# Altium PCB PCB1.PcbDoc
Units mil, origin at the board's own origin, x right, y up, seen from the top; angles counter-clockwise.
Board outline 2500 x 2300 mil, 4 copper layers (Top Layer, GND, VCC, Bottom Layer), stack 35.634 mil thick; 55 components, 72 nets, 269 pads, 87 vias.
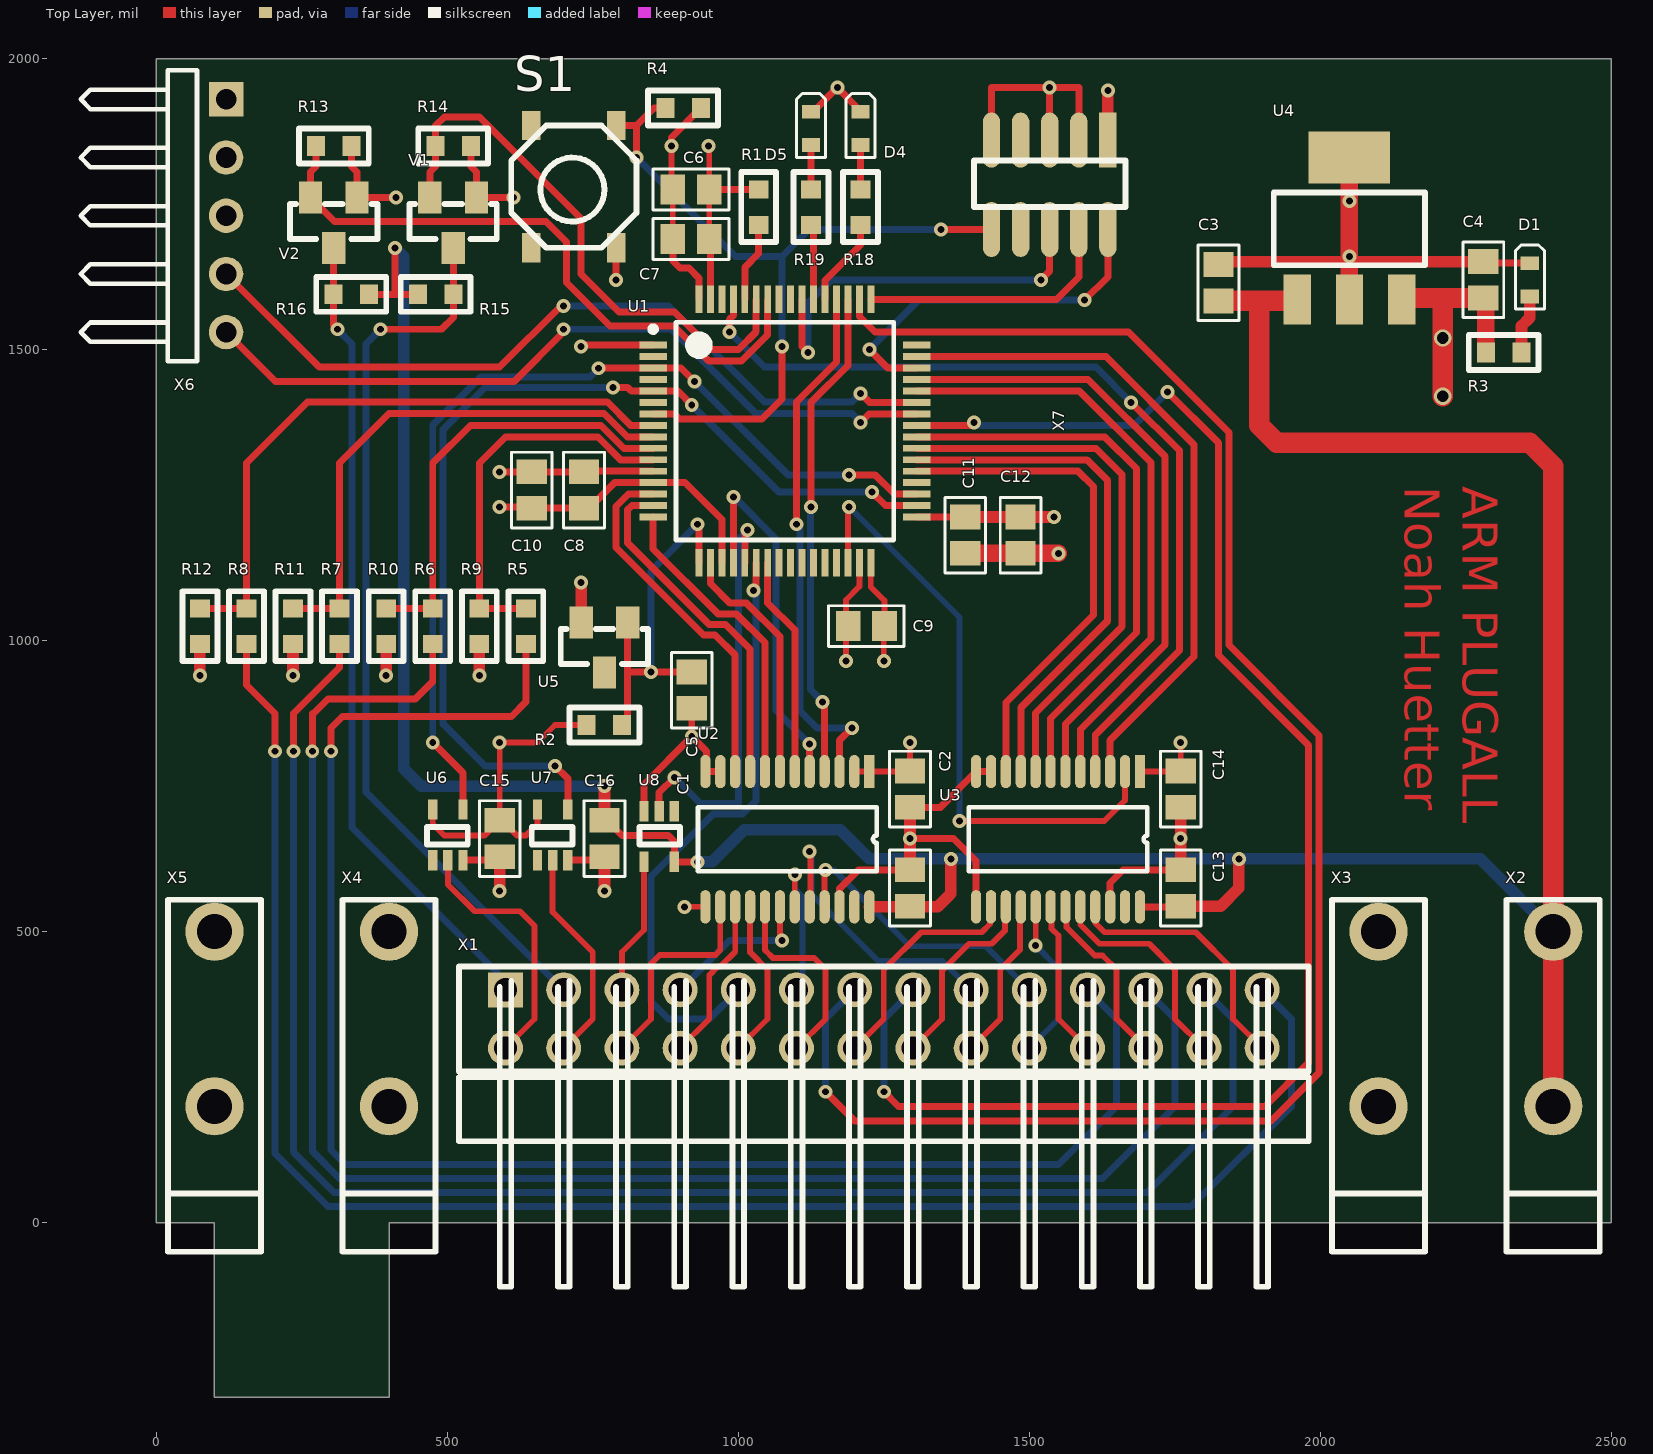
[diagram p0: Top Layer view]
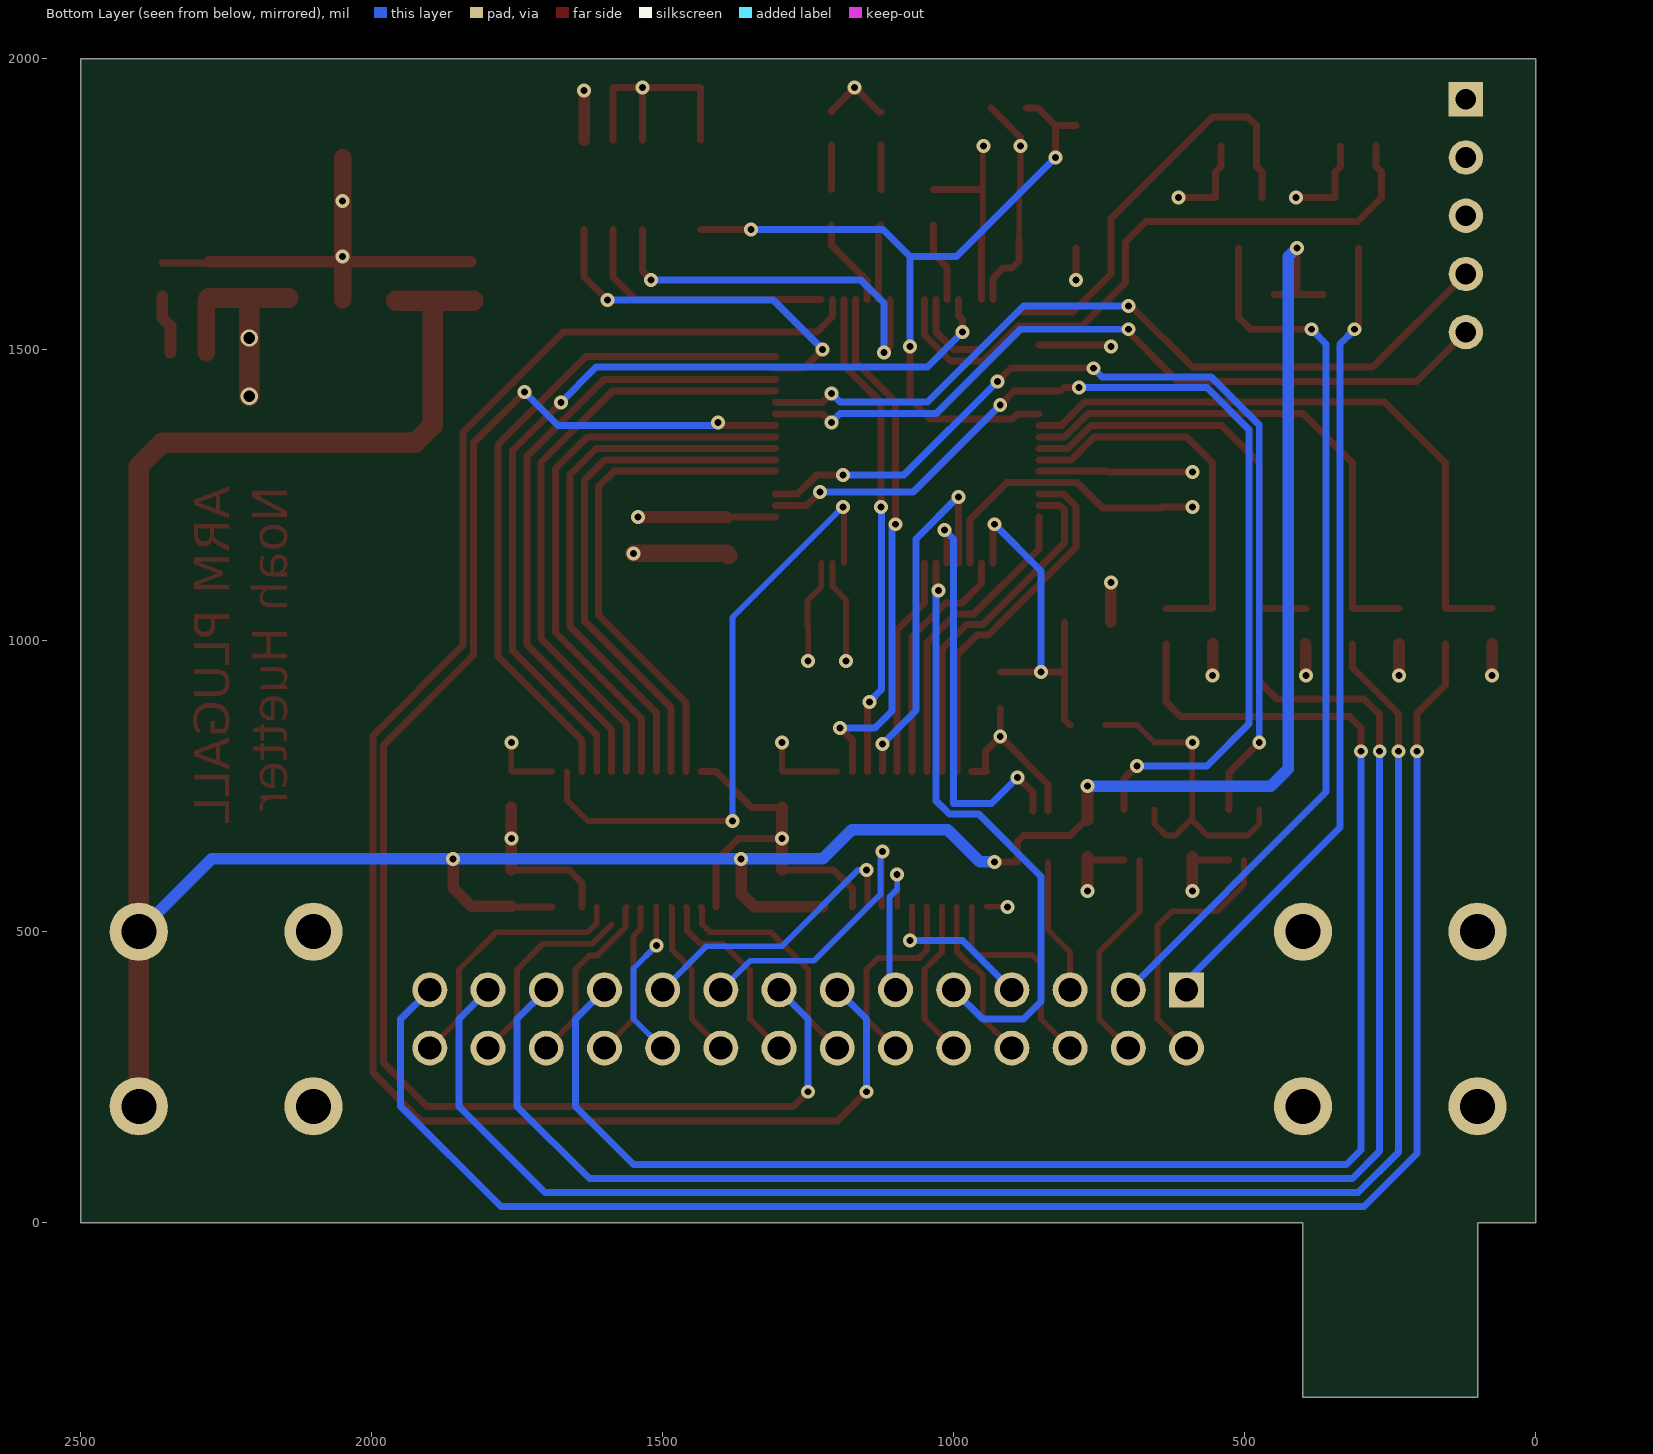
[diagram p1: Bottom Layer view, seen from below]
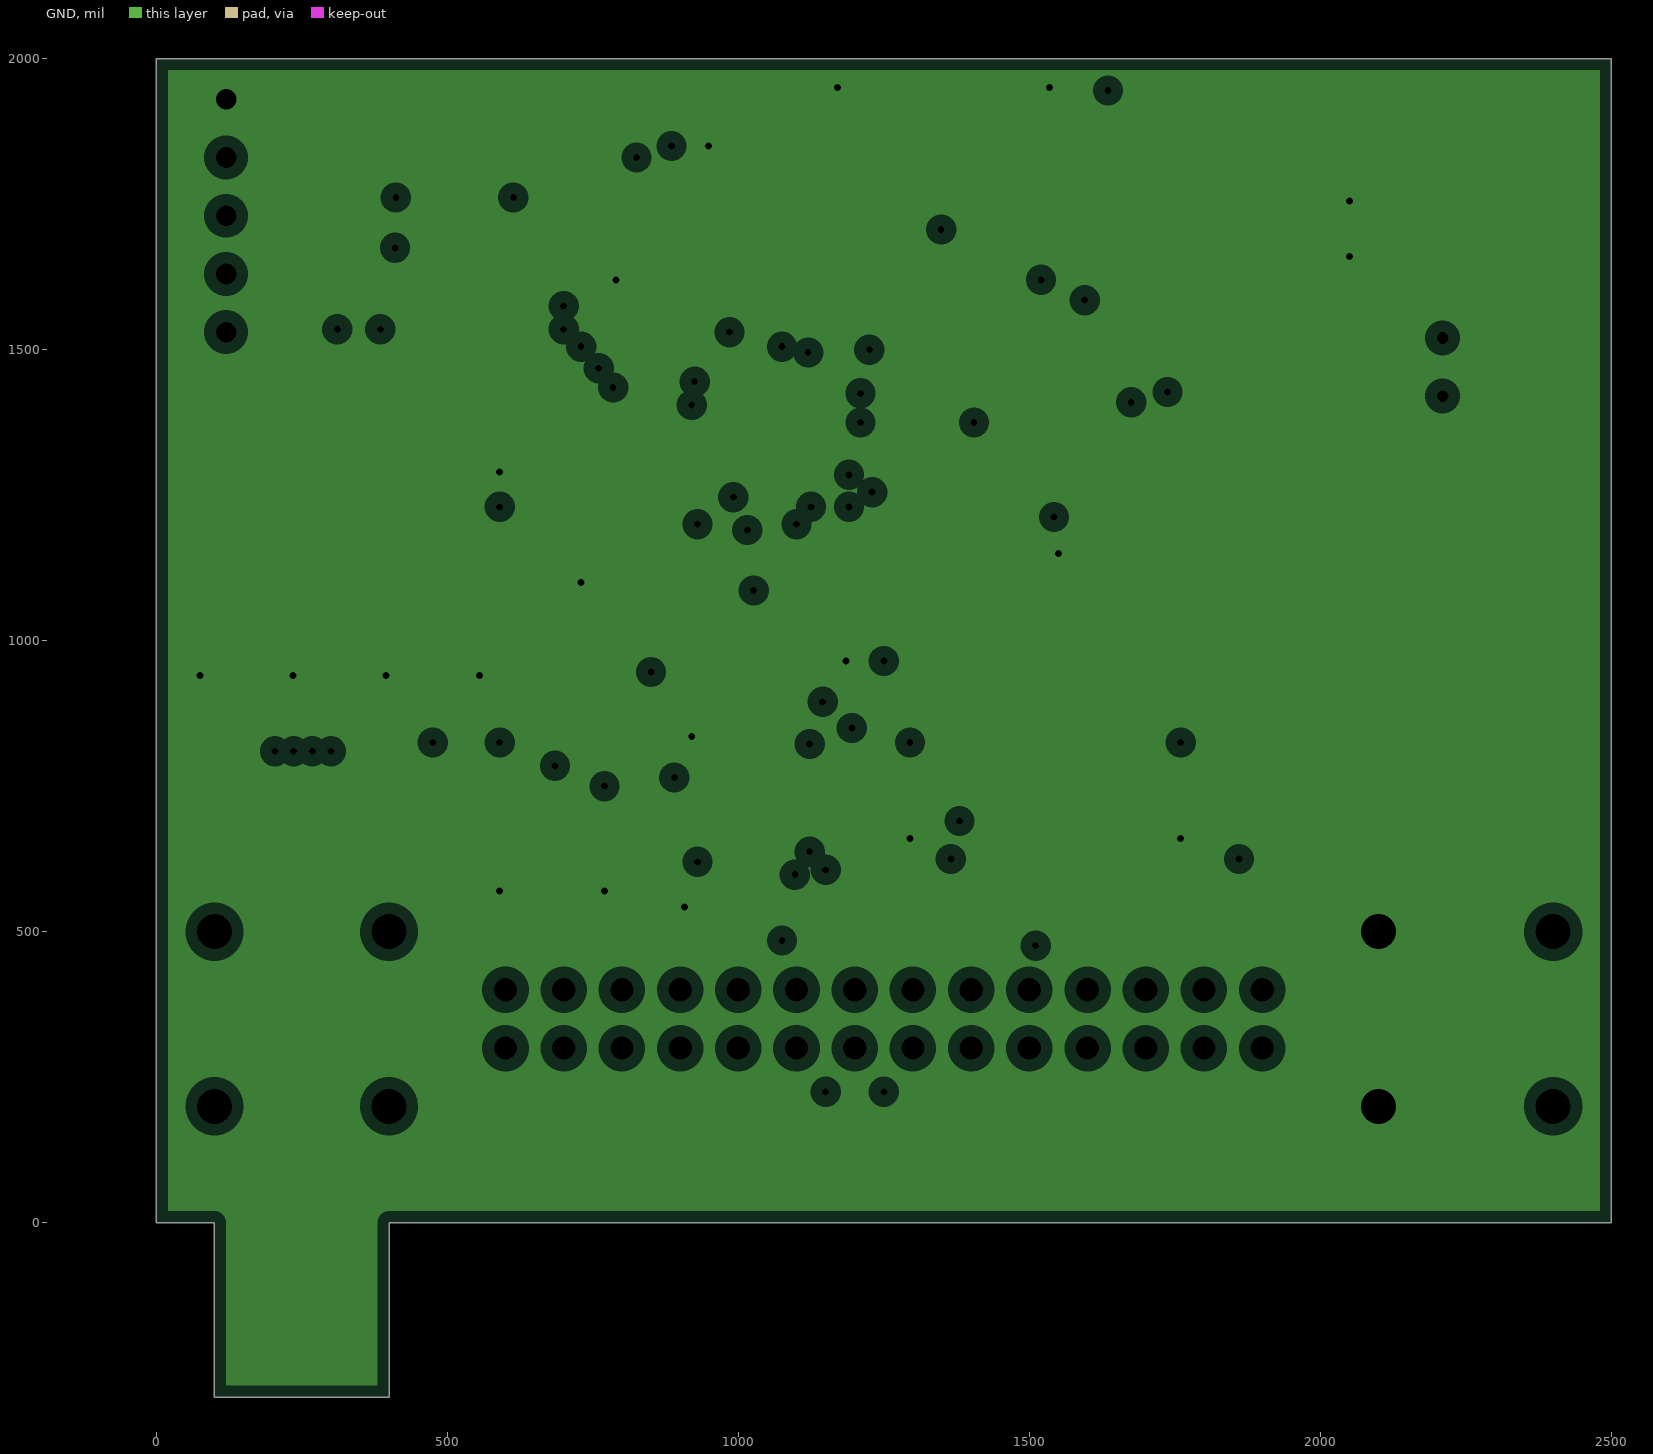
[diagram p2: GND, clearances drawn from the general rule]
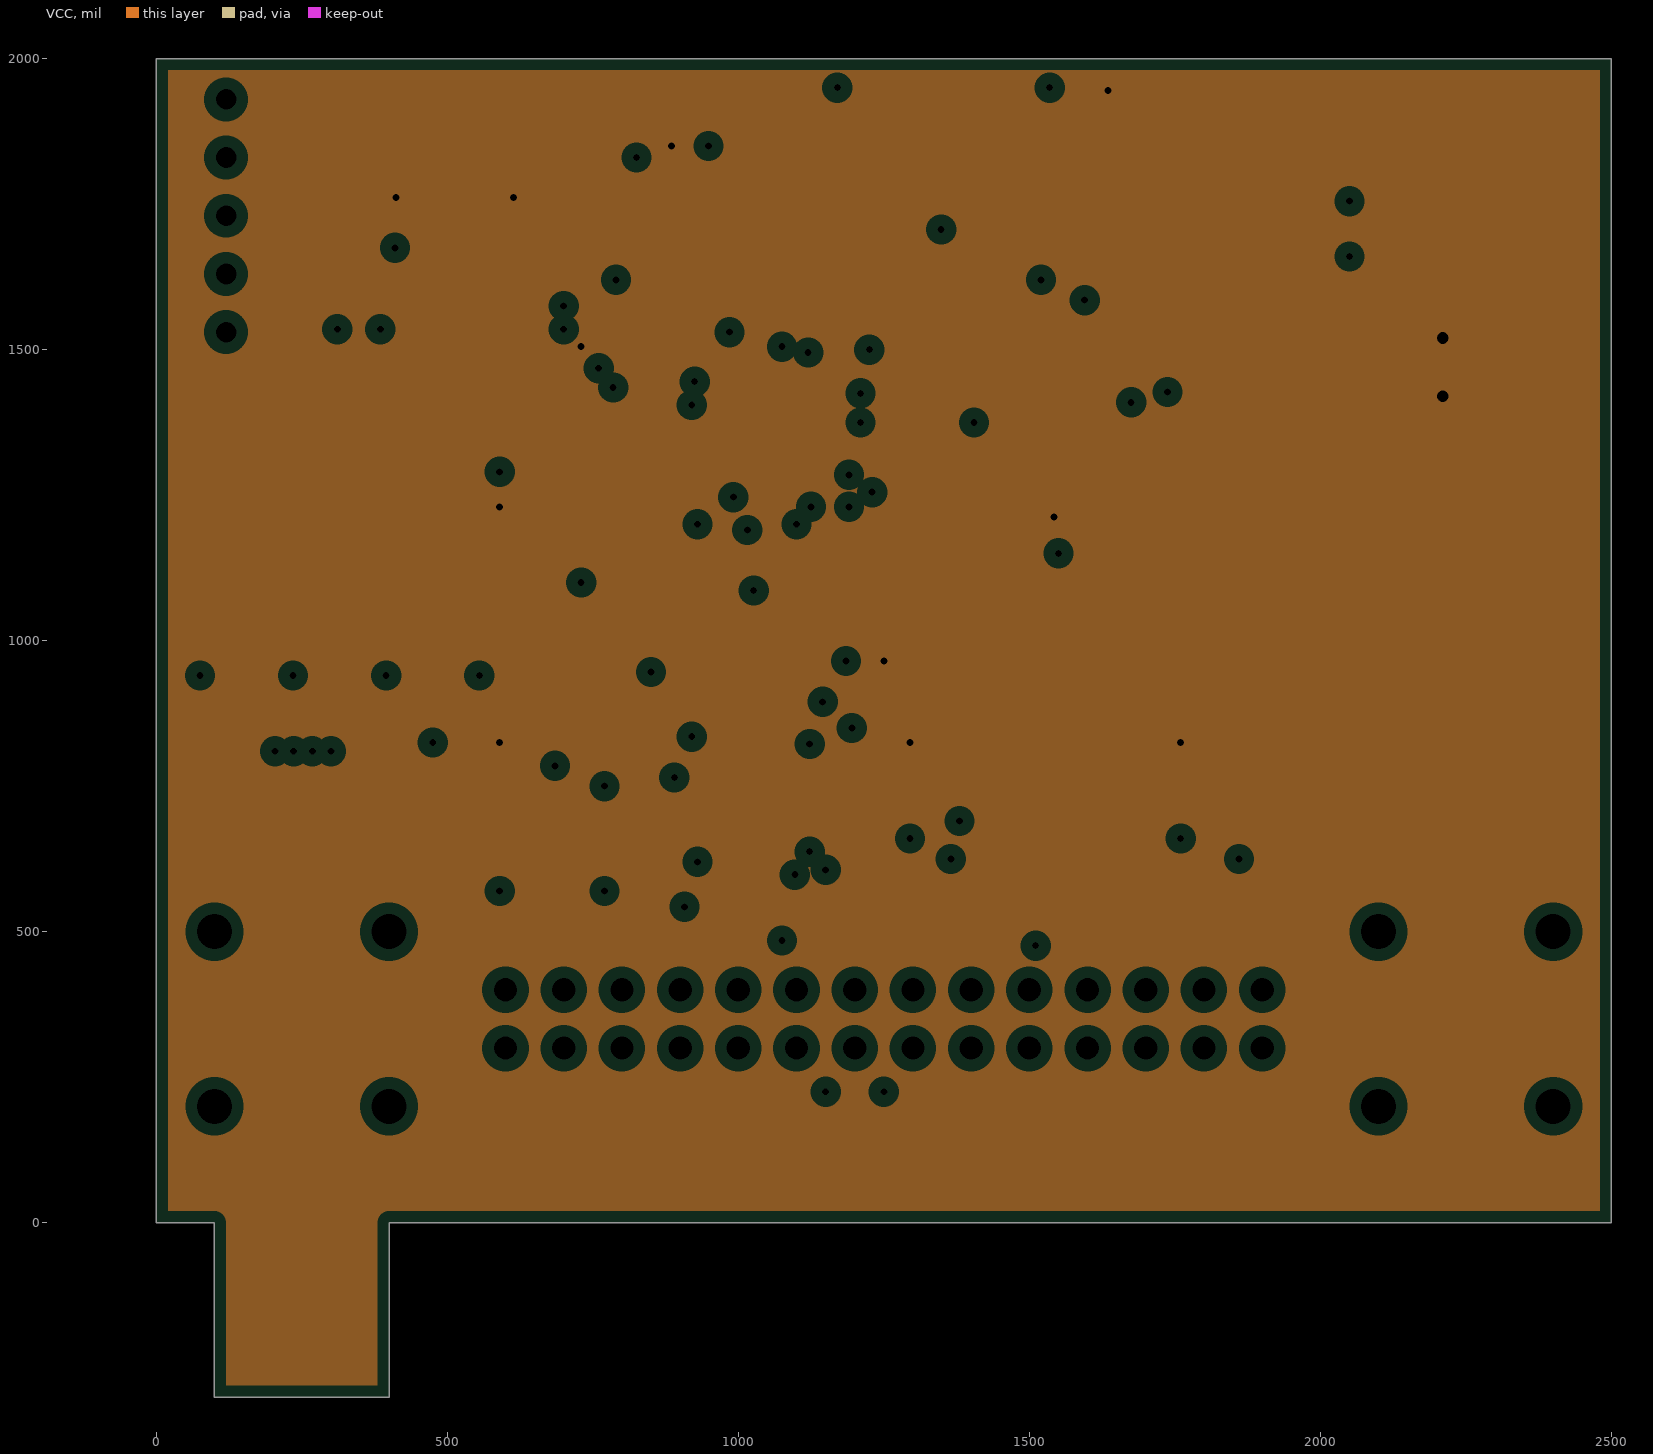
[diagram p3: VCC, clearances drawn from the general rule]

## Layer stack, top to bottom
Top Solder: solder mask 0.4, Solder Resist, Dk 3.5
Top Layer: signal copper 1.4
Dielectric 1: dielectric 10, FR-4, Dk 4.2
GND: plane copper 1.417, net GND
Dielectric 2: dielectric 10, Dk 4.2
VCC: plane copper 1.417, net 3V3
Dielectric 3: dielectric 10, Dk 4.2
Bottom Layer: signal copper 1.4
Bottom Solder: solder mask 0.4, Solder Resist, Dk 3.5

## Board outline
0,0 0,2000 70,2000 2500,2000 2500,1835 2500,0 400,0 400,-300 100,-300 100,0 0,0

## Design rules (kind name [scope] priority, off if disabled: settings)
Clearance [All] p1: gap=6
ComponentClearance [All] p1: gap=6 collisioncheckmode=3 verticalgap=6 showdistances=FALSE
PlaneClearance [All] p1: clearance=20
PlaneConnect [All] p1: planeconnectstyle=Relief reliefexpansion=20 reliefentries=4 reliefconductorwidth=20 reliefairgap=10
PolygonConnect [All] p1: connectstyle=Relief reliefconductorwidth=20 reliefentries=4 polygonreliefangle="90 Angle" airgapwidth=10
RoutingVias [All] p1: holewidth=12 width=24 viastyle="Through Hole" minholewidth=12 minwidth=24 maxholewidth=28 maxwidth=50
SolderMaskExpansion [All] p1: expansion=4
UnpouredPolygon [All] p1: allowunpoured=FALSE
Width Width_GND [InNet('GND')] p1 off: maxlimit=200 minlimit=20 preferedwidth=20
Width Width_VCC [InNet('VCC')] p2 off: maxlimit=200 minlimit=20 preferedwidth=20
Width [All] p3: maxlimit=200 minlimit=6 preferedwidth=12
26 further rules are at their usual default settings.

## Components (designator, comment, footprint, x,y, rotation, side; value= is the part's Value field where it differs from the comment)
C1 "C" 0805 1295,575 r90 top
C2 "C" 0805 1295,745 r270 top
C3 "C" 0805 1825,1615 r270 top
C4 "C" 0805 2280,1620 r270 top
C5 "C" 0805 920,915 r90 top
C6 "C" 0805 918.75,1775 r180 top
C7 "C" 0805 918.75,1690 r180 top
C8 "C" 0805 735,1258.75 r90 top
C9 "C" 0805 1220,1025 r0 top
C10 "C" 0805 645,1258.75 r270 top
C11 "C" 0805 1390,1181.25 r90 top
C12 "C" 0805 1485,1181.25 r90 top
C13 "C" 0805 1760,575 r90 top
C14 "C" 0805 1760,745 r270 top
C15 "C" 0805 590,660 r90 top
C16 "C" 0805 770,660 r90 top
D1 "LED" D_0603 2360,1620 r90 top
D4 "LED" D_0603 1210,1880 r90 top
D5 "LED" D_0603 1125,1880 r90 top
R1 "R" R_0603 1035,1745 r270 top
R2 "R" R_0603 770,855 r180 top
R3 "R" R_0603 2315,1495 r0 top
R4 "R" R_0603 905,1915 r0 top
R5 "R" R_0603 635,1025 r270 top
R6 "R" R_0603 475,1025 r270 top
R7 "R" R_0603 315,1025 r270 top
R8 "R" R_0603 155,1025 r270 top
R9 "R" R_0603 555,1025 r90 top
R10 "R" R_0603 395,1025 r90 top
R11 "R" R_0603 235,1025 r90 top
R12 "R" R_0603 75,1025 r90 top
R13 "R" R_0603 305,1850 r0 top
R14 "R" R_0603 510,1850 r0 top
R15 "R" R_0603 480,1595 r180 top
R16 "R" R_0603 335,1595 r0 top
R18 "R" R_0603 1210,1745 r270 top
R19 "R" R_0603 1125,1745 r270 top
S1 "SW" SW_4x4x1.5 790,1885 r270 top
U1 "STM32F373RBT6" STM-LQFP64_V 1080,1360 r0 top
U2 "74LVX3245" TSSOP24 1225,775 r270 top
U3 "74LVX3245" TSSOP24 1690,775 r270 top
U4 "LM3940IMP-3.3" SOT-223 2050,1830 r0 top
U5 "V_REF" SOT-23 770,945 r180 top
U6 "SN74LV1T34" DCK 475,710 r0 top
U7 "SN74LV1T34" DCK 655,710 r0 top
U8 "SN74LV1T34" DCK 890,620 r180 top
V1 "FDV301N" SOT-23 510,1675 r180 top
V2 "FDV301N" SOT-23 305,1675 r180 top
X1 "PLUGALL_Bus_Con" CON14X2 600,400 r90 top locked
X2 "Socket_2mm" 2MM_BANANA 2400,200 r90 top locked
X3 "Socket_2mm" 2MM_BANANA 2100,200 r90 top locked
X4 "Socket_2mm" 2MM_BANANA 400,200 r90 top locked
X5 "Socket_2mm" 2MM_BANANA 100,200 r90 top locked
X6 "USART1" HDR1X5H 120,1930 r270 top
X7 "SWD" 4448.0054 1635,1860 r270 top

## Footprints (in the part's own frame and the unit in brackets; to place one, negate y for a bottom-side part, rotate by r counter-clockwise, add the part's x,y. Pads: shape width x height; smd on the part's side, far side on the other; paste and mask are expansions set on the pad)
2MM_BANANA [mil]
  round 100 hole 60: 1(0,0) 2(300,0)
  silkscreen extent -250,-80 355,80
0805 [mil]
  rect 42.5x52 smd: 1(-31.25,0) 2(31.25,0)
  silkscreen extent -65,-35 65,35
4448.0054 [mm]
  rect 2.4x0.76 smd: 1(0,0)
  oval 2.4x0.76 smd: 2(3.9,0) 3(0,-1.27) 4(3.9,-1.27) 5(0,-2.54) 6(3.9,-2.54) 7(0,-3.81) 8(3.9,-3.81) 9(0,-5.08) 10(3.9,-5.08)
  silkscreen extent 0.89,-5.84 2.92,0.76
CON14X2 [mil]
  rect 60x60 hole 40: 1(0,0)
  round 60 hole 40: 2(-100,0) 3(0,-100) 4(-100,-100) 5(0,-200) 6(-100,-200) 7(0,-300) 8(-100,-300) 9(0,-400) 10(-100,-400) 11(0,-500) 12(-100,-500) 13(0,-600) 14(-100,-600) 15(0,-700) 16(-100,-700) 17(0,-800) 18(-100,-800) 19(0,-900) 20(-100,-900) 21(0,-1000) 22(-100,-1000) 23(0,-1100) 24(-100,-1100) 25(0,-1200) 26(-100,-1200) 27(0,-1300) 28(-100,-1300)
  silkscreen extent -510,-1380 40,80
D_0603 [mm]
  rect 0.6x0.8 smd: 1(-0.725,0) 2(0.725,0)
  silkscreen extent -1.27,-0.64 1.52,0.64
DCK [mil]
  rect 16x35 smd: 1(0,-87) 2(26,-87) 3(52,-87) 4(52,0) 5(0,0)
  silkscreen extent -10,-60 60,-30
HDR1X5H [mm] "Connector; Header; 5 Position; Right Angle"
  rect 1.5x1.5 hole 0.9: 1(0,0)
  round 1.5 hole 0.9: 2(2.54,0) 3(5.08,0) 4(7.62,0) 5(10.16,0)
  silkscreen extent -1.27,-6.35 11.43,-1.27
R_0603 [mil]
  rect 31x34 smd: 1(-30.5,0) 2(30.5,0)
  silkscreen extent -60,-30 60,30
SOT-23 [mil]
  rect 40x55 smd: 1(-40,-86.5) 2(40,-86.5) 3(0,0)
  silkscreen extent -75,-75 75,-15
SOT-223 [mil]
  rect 47x86 smd: 1(-90,-244) 2(0,-244) 3(90,-244)
  rect 140x89 smd: 4(0,0)
  silkscreen extent -130,-185 130,-60
STM-LQFP64_V [mm] "Thin QFP, 64-Leads, Body 10x10mm, Pitch 0.5mm, ST Recommended"
  rect 1.2x0.3 smd: 1(-5.75,3.75) 2(-5.75,3.25) 3(-5.75,2.75) 4(-5.75,2.25) 5(-5.75,1.75) 6(-5.75,1.25) 7(-5.75,0.75) 8(-5.75,0.25) 9(-5.75,-0.25) 10(-5.75,-0.75) 11(-5.75,-1.25) 12(-5.75,-1.75) 13(-5.75,-2.25) 14(-5.75,-2.75) 15(-5.75,-3.25) 16(-5.75,-3.75) 33(5.75,-3.75) 34(5.75,-3.25) 35(5.75,-2.75) 36(5.75,-2.25) 37(5.75,-1.75) 38(5.75,-1.25) 39(5.75,-0.75) 40(5.75,-0.25) 41(5.75,0.25) 42(5.75,0.75) 43(5.75,1.25) 44(5.75,1.75) 45(5.75,2.25) 46(5.75,2.75) 47(5.75,3.25) 48(5.75,3.75)
  rect 0.3x1.2 smd: 17(-3.75,-5.75) 18(-3.25,-5.75) 19(-2.75,-5.75) 20(-2.25,-5.75) 21(-1.75,-5.75) 22(-1.25,-5.75) 23(-0.75,-5.75) 24(-0.25,-5.75) 25(0.25,-5.75) 26(0.75,-5.75) 27(1.25,-5.75) 28(1.75,-5.75) 29(2.25,-5.75) 30(2.75,-5.75) 31(3.25,-5.75) 32(3.75,-5.75) 49(3.75,5.75) 50(3.25,5.75) 51(2.75,5.75) 52(2.25,5.75) 53(1.75,5.75) 54(1.25,5.75) 55(0.75,5.75) 56(0.25,5.75) 57(-0.25,5.75) 58(-0.75,5.75) 59(-1.25,5.75) 60(-1.75,5.75) 61(-2.25,5.75) 62(-2.75,5.75) 63(-3.25,5.75) 64(-3.75,5.75)
  silkscreen extent -5.87,-4.75 4.75,4.75, body extent -5,-5 5,5, height 1.6
SW_4x4x1.5 [mil]
  rect 50x32 smd: 1(0,0) 2(210,0) 3(0,-146) 4(210,-146)
  silkscreen extent 0,-180 210,35
TSSOP24 [mm]
  rect 1.45x0.45 smd: 1(0,0)
  oval 1.45x0.45 smd: 2(0,-0.65) 3(0,-1.3) 4(0,-1.95) 5(0,-2.6) 6(0,-3.25) 7(0,-3.9) 8(0,-4.55) 9(0,-5.2) 10(0,-5.85) 11(0,-6.5) 12(0,-7.15) 13(5.9,-7.15) 14(5.9,-6.5) 15(5.9,-5.85) 16(5.9,-5.2) 17(5.9,-4.55) 18(5.9,-3.9) 19(5.9,-3.25) 20(5.9,-2.6) 21(5.9,-1.95) 22(5.9,-1.3) 23(5.9,-0.65) 24(5.9,0)
  silkscreen extent 1.56,-7.48 4.34,0.33

## Part data
R1 R2 R3 R4 R5 R6 R7 R8 R9 R10 R11 R12 R13 R14 R15 R16 R18 R19: library part RES_EU
U1: library part CMP-0572-00032-2, "ARM Cortex-M4 32-bit MCU, 128 KB Flash, 24 KB Internal RAM, 52 I/Os, 64-pin LQFP, -40 to 85 degC, Tray"
V1 V2: library part MOSFET-N
X1: "PLUGALL Card Connector"
X6: library part "Header 5H", "Header, 5-Pin, Right Angle"

## Via types
v1: diameter 24, hole 12, Top Layer to Bottom Layer, 85 vias
v2: diameter 30, hole 20, Top Layer to Bottom Layer, 2 vias

## Nets (pads, with @x,y where several pads share a name; then routed paths per layer and width w, separated by ;. In a path a pad name is that pad's centre, name@x,y a point inside that pad or via, vN(x,y) a via of type N, cw(c..) or ccw(c..) an arc to the next point about the centre after c; other vN are vias at no path point)
3V3: C2.1 C4.2 C6.2 C7.2 C8.1 C9.2 C10.2 C11.2 C12.2 C14.1 C15.2 R2.2 R3.1 R4.2 R13.2 R14.2 U1.1 U1.13 U1.19 U1.32 U1.33 U1.64 U2.1 U2.2 U3.1 U4.3 U6.5 U7.5 V1.1 V2.1 X7.1 | length 3044.9
  Top Layer w10: U6.5 475,685 495,665 563.75,665 C15.2 ; U7.5 655,685 635,665 620,665 593.75,691.25 C15.2 ; R2.2 685,855 655,825 v1(590,825) C15.2 ; v1(885,1850) 885,1777.5 C6.2 C7.2 ; U2.2 U2.1 C2.1@1293.75,775 ; U1.32 1227.64,1092.36 1251.25,1068.75 C9.2 1250,1023.75 v1(1250,965) ; C2.1 v1(1295,825) ; U3.1 C14.1@1758.75,775 ; C14.1 v1(1760,825)
  Top Layer w12: R13.2 335.5,1814.5 345,1805 V2.1 v1(411.5,1761.5) ; R14.2 540.5,1814.5 550,1805 V1.1 v1(613.5,1761.5) ; v1(590,1230) 642.5,1230 C10.2 743.75,1227.5 787.67,1271.42 908.58,1271.42 971.73,1208.27 U1.19 ; v1(730,1505) 732.64,1507.64 U1.1 ; v1(885,1850) 885,1864.5 R4.2 ; C7.2 887.5,1652.5 900,1640 915,1640 932.36,1622.64 U1.64 ; U1.33 C11.2@1387.64,1212.36
  Top Layer w20: C11.2@1388.75,1211.25 C11.2 C12.2 v1(1542.5,1212.5) ; X7.1 v1(1635,1945)
  Top Layer w30: C4.2 2284.5,1584.25 R3.1
  Top Layer w35: U4.3@2142.75,1588.75 2210,1588.75 ; v2(2210,1420) 2210,1588.75 ; C4.2 2210,1588.75
  other v2: 2210,1520
+12V: X4.2
-5V: X5.2
/RESET: R4.1 S1.1 U1.7 X7.10 | length 1335.6
  Top Layer w12: S1.1 825,1885 ; v1(825,1830) 825,1885 ; U1.7 890.47,1389.53 899,1381 1041,1381 1075,1415 v1(1075,1505) ; R4.1 855,1915 825,1885 ; v1(1348.54,1706.46) X7.10
  Bottom Layer w12: v1(825,1830) 995,1660 1075,1660 ; v1(1075,1505) 1075,1660 ; v1(1348.54,1706.46) 1121.46,1706.46 1075,1660
AIN0: R5.1 R9.2 U1.11 | length 663
  Top Layer w12: R5.1 R9.2 555,1305 600,1350 758.63,1350 797.85,1310.79 U1.11
AIN1: R6.1 R10.2 U1.10 | length 751.4
  Top Layer w12: R10.2 R6.1 475,1305 540,1370 764.09,1370 803.62,1330.47 U1.10
AIN2: R7.1 R11.2 U1.9 | length 919.8
  Top Layer w12: R11.2 R7.1 315,1305 400,1390 769.54,1390 809.39,1350.16 U1.9
AIN3: R8.1 R12.2 U1.8 | length 1088.2
  Top Layer w12: R12.2 R8.1 155,1305 260,1410 775,1410 815.16,1369.84 U1.8
CP0: U6.2 X1.2 | length 451.1
  Top Layer w10: U6.2 501,581 547,535 625,535 650,510 650,350 X1.2
CP0_3V3: U1.3 U1.35 U6.4 | length 1643.6
  Top Layer w12: v1(475,825) 527,773 U6.4 ; v1(760,1468) 760.27,1468.27 U1.3 901.73,1468.27 v1(925,1445) ; v1(1190,1285) 1235,1285 1268.27,1251.73 U1.35
  Bottom Layer w12: v1(475,825) 475,1370.46 557.54,1453 745,1453 v1(760,1468) ; v1(925,1445) 1085,1285 v1(1190,1285)
CP1: U7.2 X1.4 | length 372.3
  Top Layer w10: U7.2 681,534 750,465 750,350 X1.4
CP1_3V3: U1.5 U1.34 U7.4 | length 1739.2
  Top Layer w12: v1(685,785) 707,763 U7.4 ; v1(785,1435) 810,1435 816.1,1428.9 U1.5 896.1,1428.9 v1(920,1405) ; v1(1230,1255) 1252.95,1232.05 U1.34
  Bottom Layer w12: v1(685,785) 565,785 493,857 493,1363 565,1435 v1(785,1435) ; v1(920,1405) 1070,1255 v1(1230,1255)
CS0: U2.14 X1.6 | length 366.3
  Top Layer w10: X1.6 850,350 850,445 865,460 960.66,460 967.36,466.7 ; 969.09,468.43 U2.14
CS0_3V3: U1.14 U2.10 | length 624.4
  Top Layer w12: U1.14 811.28,1251.73 790,1230.46 790,1160 940,1010 960,1010 994.68,975.32 U2.10
CS1: U2.15 X1.8 | length 284.2
  Top Layer w10: X1.8 950,350 950,425 965,440 968.94,440 994.68,465.74 U2.15
CS1_3V3: U1.15 U2.9 | length 600.1
  Top Layer w12: U1.15 817.05,1232.05 810,1225 810,1168.1 950,1028.09 978.1,1028.09 1020.27,985.92 U2.9
CS2: U2.16 X1.10 | length 275.7
  Top Layer w10: X1.10 1050,350 1050,435 1020.27,464.72 U2.16
CS2_3V3: U1.16 U2.8 | length 535.3
  Top Layer w12: U1.16 853.62,1157.57 965,1046.19 996.19,1046.19 1045.87,996.52 U2.8
CS3: U2.17 X1.12 | length 345.5
  Top Layer w10: 1045.87,468.43 U2.17 ; 1047.6,466.7 1059.3,455 1130,455 1150,435 1150,350 X1.12
CS3_3V3: U1.18 U2.7 | length 424.8
  Top Layer w12: U1.18 952.05,1097.95 985.71,1064.29 1014.29,1064.29 1071.46,1007.12 U2.7
D0: U3.14 X1.14 | length 400.7
  Top Layer w10: X1.14 1250,350 1250,435 1314.17,499.17 1418.39,499.17 1432.36,513.15 1432.36,540.98 U3.14
D0_3V3: U1.37 U3.10 | length 866.7
  Top Layer w12: U1.37 1583.9,1291.1 1610,1265 1610,1044.36 1459.68,894.04 U3.10
D1: U3.15 X1.16 | length 331.9
  Top Layer w10: X1.16 1350,350 1350,433.03 1396.14,479.17 1435.42,479.17 1457.95,501.7 1457.95,540.98 U3.15
D1_3V3: U1.38 U3.9 | length 905.1
  Top Layer w12: U1.38 1599.12,1310.79 1634.68,1275.22 1634.68,1034.13 1485.27,884.72 U3.9
D2: U3.16 X1.18 | length 278
  Top Layer w10: X1.18 1450,350 1450,435 1483.87,468.87 1483.87,541.31 U3.16
D2_3V3: U1.39 U3.8 | length 943.6
  Top Layer w12: U1.39 1614.34,1330.47 1659.37,1285.45 1659.37,1023.91 1510.87,875.41 U3.8
D3: U3.17 X1.20 | length 279.6
  Top Layer w10: v1(1510.87,475.87) U3.17
  Bottom Layer w10: X1.20 1550,350 1550,436.73 v1(1510.87,475.87)
D3_3V3: U1.40 U3.7 | length 982.1
  Top Layer w12: U1.40 1629.57,1350.16 1684.05,1295.67 1684.05,1013.69 1536.46,866.09 U3.7
D4: U3.18 X1.22 | length 266.6
  Top Layer w10: U3.18@1538.19,540.98 1538.19,505.07 1550,493.26 1550,350 X1.22
D4_3V3: U1.44 U3.6 | length 1045
  Top Layer w12: U1.44 1585.74,1428.9 1708.74,1305.9 1708.74,1003.46 1562.05,856.77 U3.6
D5: U3.19 X1.24 | length 307.7
  Top Layer w10: U3.19 1563.78,540.98 1563.78,507.76 1612.37,459.17 1625.83,459.17 1650,435 1650,350 X1.24
D5_3V3: U1.45 U3.5 | length 1083.4
  Top Layer w12: U1.45 1600.96,1448.58 1733.42,1316.12 1733.42,993.24 1587.64,847.46 U3.5
D6: U3.20 X1.26 | length 350
  Top Layer w10: 1587.64,512.19 1620.65,479.17 1705.83,479.17 1750,435 1750,350 X1.26
D6_3V3: U1.61 U3.4 | length 1527.9
  Top Layer w12: v1(985,1530) 985,1552.17 991.42,1558.58 U1.61 ; U3.4 1613.23,838.14 1758.1,983.01 1758.1,1326.35 v1(1675,1409.45)
  Bottom Layer w12: v1(985,1530) 1045,1470 1614.45,1470 v1(1675,1409.45)
D7: U3.21 X1.28 | length 453.4
  Top Layer w10: U3.21 1613.23,514.88 1628.94,499.17 1785.83,499.17 1850,435 1850,350 X1.28
D7_3V3: U1.47 U3.3 | length 1160.3
  Top Layer w12: U1.47 1631.41,1487.95 1782.79,1336.57 1782.79,972.79 1638.82,828.82 U3.3
DAC0: U2.20 X1.17 | length 512.5
  Top Layer w10: U2.20 1124.05,544.13 1124.05,635.95 v1(1122.64,637.36)
  Bottom Layer w10: v1(1122.64,637.36) 1126,634 1126,564 1240,450 1350,450 X1.17
DAC0_3V3: U1.51 U2.4 | length 843.5
  Top Layer w12: v1(1125,1230) 1125,1409.54 1188.27,1472.81 U1.51 ; U2.4 v1@1148.23,891.77
  Bottom Layer w12: v1(1125,1230) 1124,1229 1124,916 v1(1145,895)
DAC1: U2.21 X1.19 | length 499.7
  Top Layer w10: U2.21 1148.23,604.46 v1(1150,606.23)
  Bottom Layer w10: v1(1150,606.23) 1163.77,606.23 1295,475 1425,475 X1.19
DAC1_3V3: U1.52 U2.3 | length 923.1
  Top Layer w12: v1(1100,1200) 1100,1410 1168.58,1478.58 U1.52 ; U2.3 1173.82,828.82 v1(1195,850)
  Bottom Layer w12: v1(1100,1200) 1106,1194 1106,879 1135,850 v1(1195,850)
DATA_TR: U1.30 U3.2 | length 1064.4
  Top Layer w10: U1.30 1188.27,1228.27 v1(1190,1230) ; v1(1380,690) 1628.82,690 1664.41,725.59 U3.2
  Bottom Layer w10: v1(1190,1230) 1380,1040 v1(1380,690)
GND: C1.2 C2.2 C3.1 C4.1 C5.1 C6.1 C7.1 C8.2 C9.1 C10.1 C11.1 C12.1 C13.2 C14.2 C15.1 C16.1 D1.2 D4.2 D5.2 R1.1 R9.1 R10.1 R11.1 R12.1 S1.2 U1.12 U1.31 U1.63 U2.11 U2.12 U2.13 U2.22 U3.11 U3.12 U3.13 U3.22 U4.2 U4.4 U5.2 U6.3 U7.3 U8.3 X3.1 X3.2 X6.1 X7.3 X7.5 X7.9 | length 4121.9
  Top Layer w10: C15.1@584.25,623 C15.1@590,628.75 ; C16.1@764.25,623 C16.1@770,628.75 ; v1(907.72,542.72) U2.13 ; v1(948.75,1850) 950,1848.75 C7.1 ; v1(1185,965) 1185,1070 1207.95,1092.95 U1.31
  Top Layer w12: U6.3 C15.1@584.25,623 ; v1(590,1290) C10.1 C8.2 ; U7.3 C16.1@764.25,623 ; C8.2@736.1,1291.1 U1.12 ; v1(790,1620) S1.2 ; U8.3 838,753 v1(920,835) ; C5.1 v1(920,835) ; C6.1@950.5,1775.5 R1.1 ; U1.63 C7.1@952.05,1687.95 ; U2.11 U2.12 945,776.5 945,810 v1(920,835) ; D5.2 1128.54,1908.54 v1(1170,1950) 1210,1910 D4.2 ; U2.22 1173.82,573.82 1206.25,606.25 C1.2 ; v1(1295,660) 1370,660 1408.5,621.5 U3.13 ; C2.2 1347.25,713.75 U3.12 U3.11 ; X7.9 1435,1950 v1(1535,1950) ; X7.5 v1(1535,1950) ; X7.3 1585,1950 v1(1535,1950) ; U3.22 1638.82,583.82 1661.25,606.25 C13.2 ; C4.1@2282.71,1648.54 D1.2
  Top Layer w20: v1(75,940) R12.1 ; v1(235,940) R11.1 ; v1(395,940) R10.1 ; v1(555,940) R9.1 ; v1(590,570) C15.1@590,628.75 ; U5.2 v1(730,1100) ; v1(770,570) C16.1@770,628.75 ; C1.2 v1(1295,660) C2.2 ; C13.2 v1(1760,660) C14.2 ; C3.1@1830,1651.25 2050,1651.25 C4.1
  Top Layer w30: C11.1@1386.25,1146.25 C11.1 C12.1 v1(1550,1150) ; U4.2 2050,1651.25 v1(2050,1660) v1(2050,1755) U4.4
INT0: U1.50 X1.13 | length 3009.5
  Top Layer w12: v1(1150,225) 1200,175 1915.36,175 1998,257.64 1998,837.36 1842.68,992.68 1842.68,1357.32 1670,1530 1235,1530 1207.95,1557.05 U1.50
  Bottom Layer w12: v1(1150,225) 1150,350 X1.13
INT1: U1.41 X1.15 | length 2678.9
  Top Layer w12: v1(1250,225) 1275,200 1905,200 1980,275 1980,820 1824.68,975.32 1824.68,1339.97 v1(1737.32,1427.32) ; U1.41 1399.84,1369.84 v1(1405,1375)
  Bottom Layer w12: v1(1250,225) 1250,350 X1.15 ; v1(1405,1375) 1410,1370 1680,1370 v1(1737.32,1427.32)
MISO_3V3: U1.22 X1.9 | length 1044.1
  Top Layer w12: v1(1026.47,1086.04) 1030.79,1090.36 U1.22
  Bottom Layer w12: X1.9 950,350 880,350 850,380 850,595 957,702 1007.46,702 1030,724.54 1030,1082.51 v1(1026.47,1086.04)
MOSI: U2.18 X1.7 | length 269.4
  Top Layer w10: U2.18 1071.46,488.54 v1(1075,485)
  Bottom Layer w12: X1.7 985,485 v1(1075,485)
MOSI_3V3: U1.23 U2.6 | length 377.9
  Top Layer w12: U1.23 1050.47,1064.53 1097.05,1017.95 U2.6
NetC5_2: C5.2 R2.1 U1.17 U5.1 | length 640.1
  Top Layer w12: R2.1 810,864.5 U5.1 ; 811.25,946.25 v1(850,946.25) C5.2 ; U1.17 v1@932.36,1197.64
  Bottom Layer w12: v1(850,946.25) 850,1120 v1(930,1200)
NetD1_1: D1.1 R3.2 | length 102.5
  Top Layer w20: R3.2 2345.5,1540.5 2360,1555 D1.1
NetD4_1: D4.1 R18.1 | length 76
  Top Layer w12: R18.1 D4.1
NetD5_1: D5.1 R19.1 | length 76
  Top Layer w12: R19.1 D5.1
NetR1_2: R1.2 U1.60 | length 138
  Top Layer w12: U1.60 1011.1,1641.1 1035,1665 R1.2
NetR5_2: R5.2 X1.21 | length 2800.6
  Top Layer w12: v1(300,810) 300,850 320,870 610,870 635,895 R5.2
  Bottom Layer w12: v1(300,810) 300,125 325,100 1550,100 1650,200 1650,350 X1.21
NetR6_2: R6.2 X1.23 | length 2819.8
  Top Layer w12: v1(268,810) 268,875 270,875 295,900 445,900 475,930 R6.2
  Bottom Layer w12: v1(268,810) 268,123.06 315.06,76 1626,76 1750,200 1750,350 X1.23
NetR7_2: R7.2 X1.25 | length 2830.7
  Top Layer w12: v1(236,810) 236,875 315,954 R7.2
  Bottom Layer w12: v1(236,810) 236,121.12 305.12,52 1702,52 1850,200 1850,350 X1.25
NetR8_2: R8.2 X1.27 | length 2971.3
  Top Layer w12: R8.2 155,924 204,875 v1(204,810)
  Bottom Layer w12: v1(204,810) 204,119.18 295.18,28 1778,28 1950,200 1950,350 X1.27
NetR18_2: R18.2 U1.53 | length 153.4
  Top Layer w12: U1.53 1148.9,1618.9 1210,1680 R18.2
NetR19_2: R19.2 U1.54 | length 129.9
  Top Layer w12: R19.2 1129.21,1710.29 U1.54
NetU8_4: U8.4 X1.5 | length 235.7
  Top Layer w10: X1.5 800,465 838,503 U8.4
NSS: U2.19 X1.11 | length 248.6
  Top Layer w10: U2.19 v1(1097.05,597.95)
  Bottom Layer w10: v1(1097.05,597.95) 1097.05,572.95 1110,560 X1.11@1110,410
NSS_3V3: U1.20 U2.5 | length 639.8
  Top Layer w12: U1.20 v1(991.42,1246.42) ; U2.5 v1(1122.64,822.64)
  Bottom Layer w12: v1(991.42,1246.42) 993.58,1246.42 1065,1175 1065,880.28 v1(1122.64,822.64)
SCK_3V3: U1.21 U8.2 | length 736
  Top Layer w12: U8.2 864,739 v1(890,765) ; U1.21 1011.1,1188.9 1010,1190 v1(1015.42,1190)
  Bottom Layer w12: v1(890,765) 935,720 1000,720 1000,1174.58 v1(1015.42,1190)
SCL: R16.1 V2.3 X1.1 | length 1396.9
  Top Layer w12: V2.3@304.5,1674.5 R16.1 304.5,1541.5 v1(311,1535)
  Bottom Layer w12: v1(311,1535) 336,1510 336,679 600,415 X1.1
SCL_3V3: R13.1 U1.58 V2.2 | length 1115.3
  Top Layer w12: R13.1 274.5,1814.5 265,1805 V2.2 306.18,1720.32 669.68,1720.32 705,1685 705,1615 779.68,1540.32 889.23,1540.32 949.23,1480.32 1005.77,1480.32 1050.47,1525.02 U1.58
SDA: R15.1 V1.3 X1.3 | length 1539.2
  Top Layer w12: v1(385,1535) 490,1535 510.5,1555.5 R15.1 V1.3@510.5,1674.5
  Bottom Layer w12: v1(385,1535) 360,1510 360,740 X1.3
SDA_3V3: R14.1 U1.59 V1.2 | length 974.3
  Top Layer w12: V1.2 470,1805 480,1815 480,1885 495,1900 555,1900 730,1725 730,1630 795,1565 890,1565 955,1500 1000,1500 1030.79,1530.79 U1.59
SWCLK: U1.49 X7.4 | length 454.8
  Top Layer w12: U1.49 1546.38,1586.38 1585,1625 X7.4
SWDAT: U1.46 X7.2 | length 637.8
  Top Layer w12: v1(1225,1500) 1256.73,1468.27 U1.46 ; v1(1595,1585) 1635,1625 X7.2
  Bottom Layer w12: v1(1225,1500) 1310,1585 v1(1595,1585)
SWO: U1.55 X7.6 | length 690
  Top Layer w12: U1.55 1109.53,1505.47 v1(1120,1495) ; v1(1520,1620) 1535,1635 X7.6
  Bottom Layer w12: v1(1120,1495) 1120,1580 1160,1620 v1(1520,1620)
USART1_RX: U1.43 X6.4 | length 1377.2
  Top Layer w12: X6.4 280,1470 590,1470 695,1575 v1(700,1575) ; v1(1210,1425) 1225.79,1409.21 U1.43
  Bottom Layer w12: v1(700,1575) 880,1575 1045,1410 1195,1410 v1(1210,1425)
USART1_TX: U1.42 X6.5 | length 1334.1
  Top Layer w12: X6.5 205,1445 615,1445 700,1530 v1(700,1535) ; v1(1210,1375) 1224.53,1389.53 U1.42
  Bottom Layer w12: v1(700,1535) 885,1535 1030,1390 1195,1390 v1(1210,1375)
VCC: C1.1 C3.2 C13.1 C16.2 R15.2 R16.2 U2.24 U3.24 U4.1 U8.5 X2.1 X2.2 | length 5664.7
  Top Layer w12: R16.2 410,1595 ; v1(410,1675) 410,1595 ; R15.2 410,1595 ; C16.2 773.75,691.25 800,665 880,665 890,655 U8.5 v1@920,620 ; U3.24 C13.1@1758.97,542.72
  Top Layer w20: C16.2 v1(770,750) ; U2.24 1342.72,542.72 1365,565 v1(1365,625) ; C13.1@1760,543.75 1828.75,543.75 1860,575 v1(1860,625)
  Top Layer w35: C3.2 1891.37,1583.75 ; U4.1@1957.75,1583.75 1895,1583.75 1895,1370 1925,1340 2360,1340 2400,1300 X2.2 X2.1
  Bottom Layer w20: v1(410,1675) 425,1660 425,780 455,750 v1(770,750) ; v1(930,620) 955,620 1010,675 1175,675 1225,625 v1(1365,625) v1(1860,625) 2275,625 X2.2
pads on no net: S1.3 S1.4 U1.2 U1.4 U1.6 U1.24 U1.25 U1.26 U1.27 U1.28 U1.29 U1.36 U1.48 U1.56 U1.57 U1.62 U2.23 U3.23 U5.3 U6.1 U7.1 U8.1 X4.1 X5.1 X6.2 X6.3 X7.7 X7.8

## Polygon pours and split planes (outlines as drawn)
GND on GND (split plane): 2479.9,1835 2479.9,20.1 400,20.1 396.08,19.71 392.31,18.57 388.84,16.71 385.79,14.21 383.29,11.17 381.43,7.69 380.29,3.92 379.9,0 379.9,-279.9 120.1,-279.9 120.1,0 119.71,3.92 118.57,7.69 116.71,11.17 114.21,14.21 111.17,16.71 107.69,18.57 103.92,19.71 100,20.1 20.1,20.1 20.1,1979.9 2479.9,1979.9
3V3 on VCC (split plane): 2479.9,1835 2479.9,20.1 400,20.1 396.08,19.71 392.31,18.57 388.84,16.71 385.79,14.21 383.29,11.17 381.43,7.69 380.29,3.92 379.9,0 379.9,-279.9 120.1,-279.9 120.1,0 119.71,3.92 118.57,7.69 116.71,11.17 114.21,14.21 111.17,16.71 107.69,18.57 103.92,19.71 100,20.1 20.1,20.1 20.1,1979.9 2479.9,1979.9

## Other copper
Top Layer:
  text "Noah Huetter" at 2145,1265 h60 r270
  text "ARM PLUGALL" at 2245,1265 h60 r270

## Silkscreen, mask and mechanical layers (free items; w line width, h text height)
Drill Guide:
  text ".LEGEND" at -660,3330 h60
Mill:
  lines w80: -40,0 ccw(c0,0) 0,-40 ; -40,0 ccw(c0,0) 0,-40 ; -40,0 ccw(c0,0) 0,-40 ; -40,0 -40,2000 ; -40,2000 cw(c0,2000) 0,2040 ; -40,2000 cw(c0,2000) 0,2040 ; 0,-40 60,-40 60,-300 ; 0,2040 70,2040 2500,2040 ; 60,-300 ccw(c100,-300) 100,-340 ; 60,-300 ccw(c100,-300) 100,-340 ; 100,-340 400,-340 ; 400,-340 ccw(c400,-300) 440,-300 ; 400,-340 ccw(c400,-300) 440,-300 ; 440,-300 440,-40 2500,-40 ; 2500,-40 ccw(c2500,0) 2540,0 ; 2500,-40 ccw(c2500,0) 2540,0 ; 2500,2040 cw(c2500,2000) 2540,2000 ; 2500,2040 cw(c2500,2000) 2540,2000 ; 2540,0 2540,1835 2540,2000
Drill Drawing:
  circle w3.33: c-526.88,3035 r25
  lines w3.33: -551.88,2460 -501.88,2460 -526.88,2410 -551.88,2460 ; -551.88,2560 -501.88,2560 -501.88,2610 -551.88,2610 -551.88,2560 ; -551.88,2710 -526.88,2722.5 -501.88,2710 -514.38,2735 -501.88,2760 -526.88,2747.5 -551.88,2760 -539.38,2735 -551.88,2710 ; -551.88,2872.5 -539.38,2872.5 -526.88,2860 -514.38,2872.5 -501.88,2872.5 -514.38,2885 -501.88,2897.5 -514.38,2897.5 -526.88,2910 -539.38,2897.5 -551.88,2897.5 -539.38,2885 -551.88,2872.5
  lines w15: -620,2365 3258.97,2365 ; -620,3115 3258.97,3115 ; -69.12,2215 -69.12,3265 ; 628.69,2215 628.69,3265 ; 1974.29,2215 1974.29,3265 ; 2480.17,2215 2480.17,3265 ; -620,2215 3258.97,2215 3258.97,3265 -620,3265 -620,2215
  text "Symbol" at -530,3160 h72
  text "Hit Count" at -24.12,3160 h72
  text "Finished Hole Size" at 673.69,3160 h72
  text "Plated" at 2019.29,3160 h72
  text "Hole Type" at 2525.17,3160 h72
  text "2" at -24.12,3010 h60
  text "20,00mil (0,508mm)" at 673.69,3010 h60
  text "PTH" at 2019.29,3010 h60
  text "Round" at 2525.17,3010 h60
  text "5" at -24.12,2860 h60
  text "35,43mil (0,900mm)" at 673.69,2860 h60
  text "PTH" at 2019.29,2860 h60
  text "Round" at 2525.17,2860 h60
  text "8" at -24.12,2710 h60
  text "60,00mil (1,524mm)" at 673.69,2710 h60
  text "PTH" at 2019.29,2710 h60
  text "Round" at 2525.17,2710 h60
  text "28" at -24.12,2560 h60
  text "40,00mil (1,016mm)" at 673.69,2560 h60
  text "PTH" at 2019.29,2560 h60
  text "Round" at 2525.17,2560 h60
  text "85" at -24.12,2410 h60
  text "12,00mil (0,305mm)" at 673.69,2410 h60
  text "PTH" at 2019.29,2410 h60
  text "Round" at 2525.17,2410 h60
  text "128 Total" at -24.12,2260 h60